# Altium PCB PCB1.PcbDoc
Units mm, origin at the board's own origin, x right, y up, seen from the top; angles counter-clockwise.
Board outline 122.68 x 41.02 mm, 2 copper layers (Top Layer, Bottom Layer); 45 components, 46 nets, 188 pads, 7 vias.
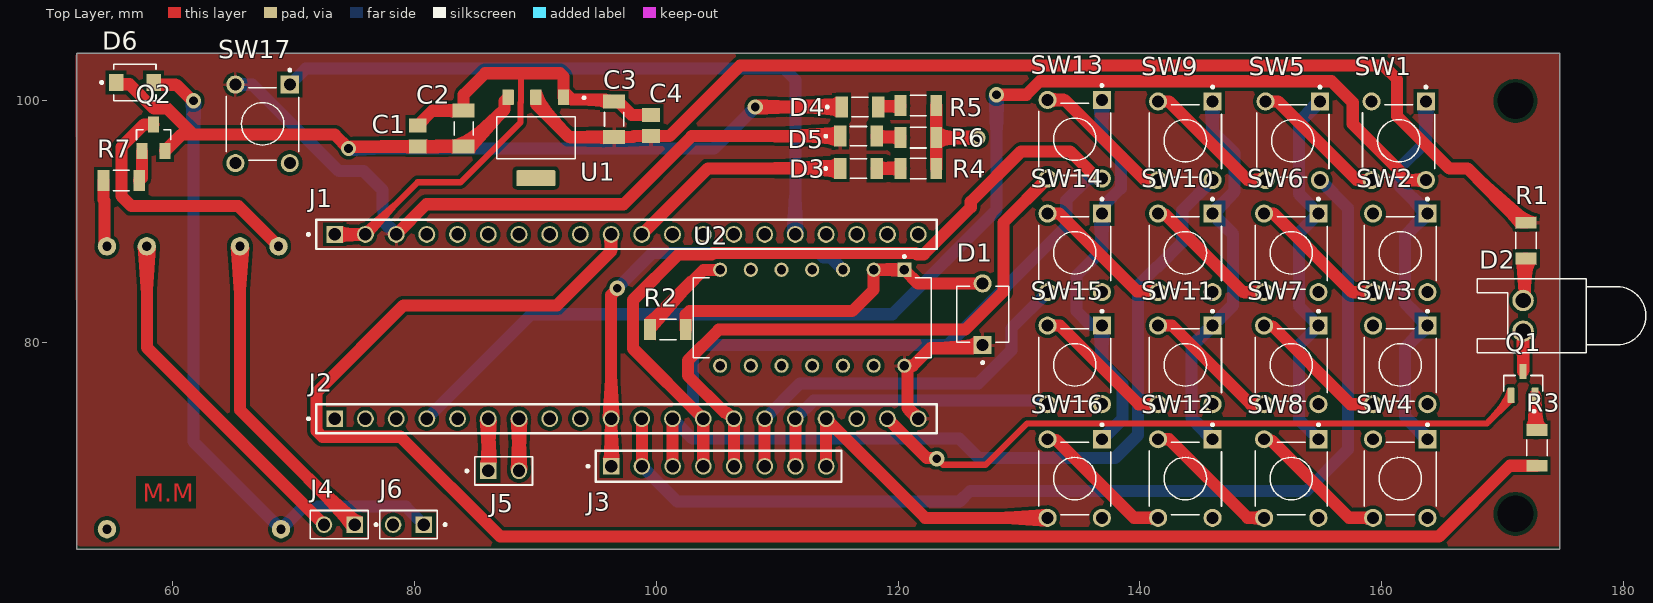
[diagram p0: Top Layer view]
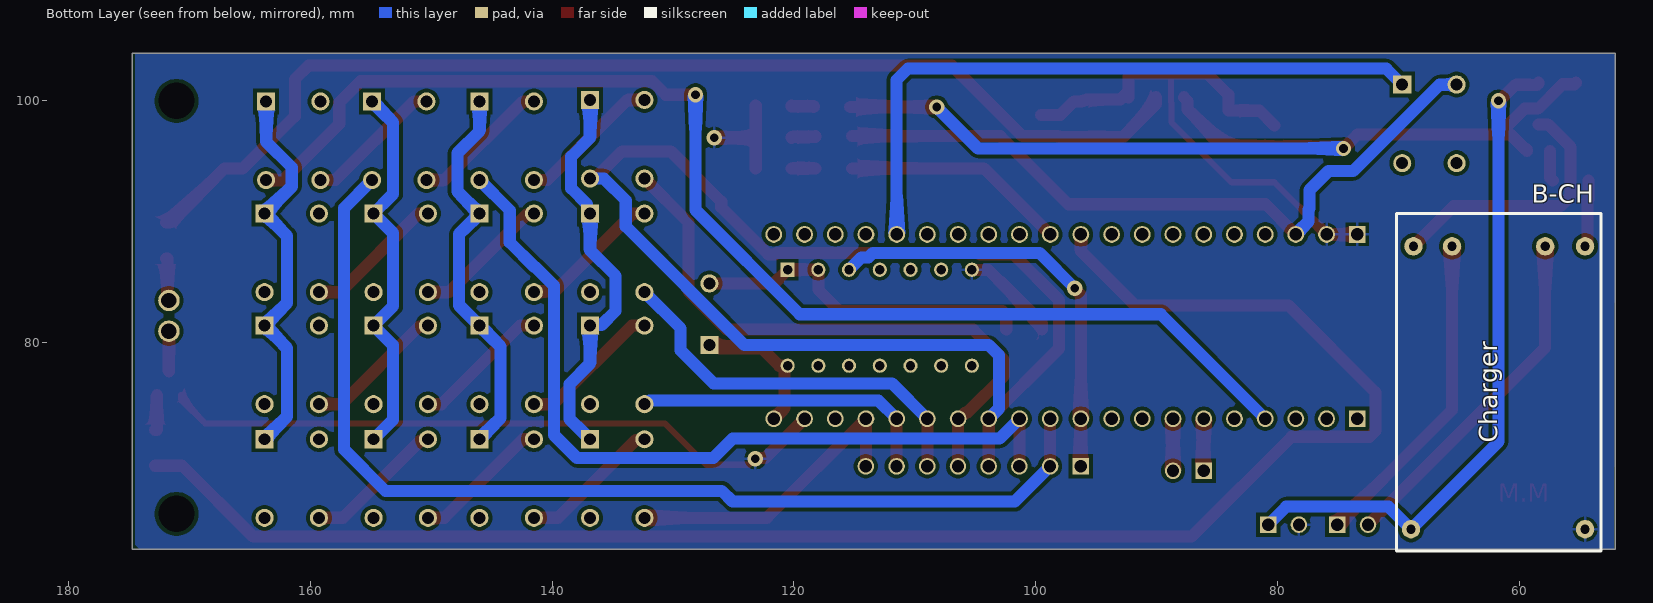
[diagram p1: Bottom Layer view, seen from below]
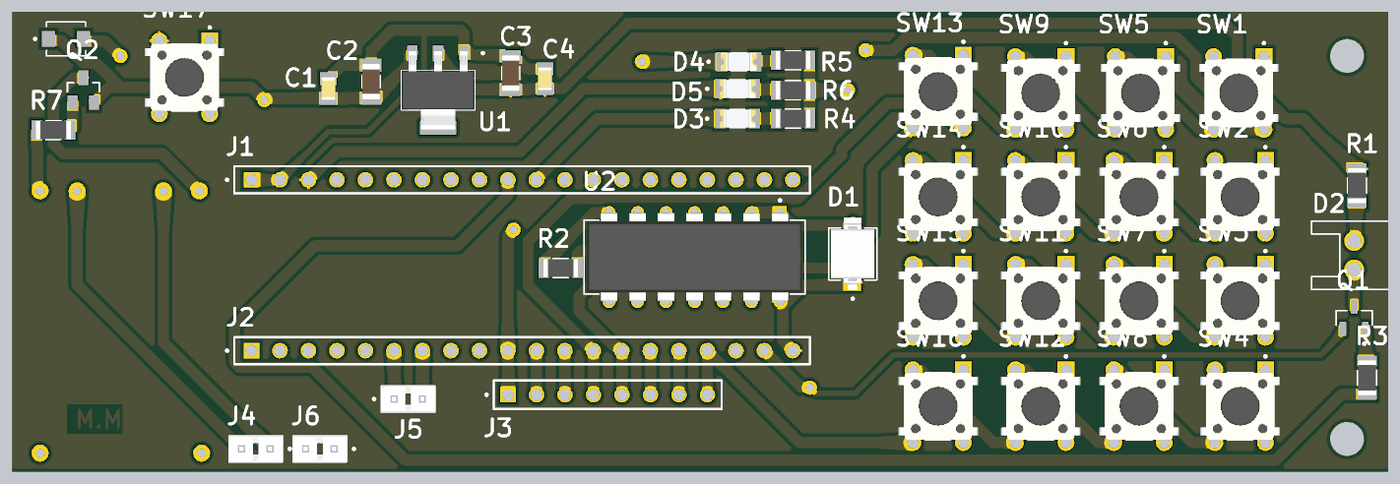
[diagram p2: 3D render of the assembled board from above, using the file's embedded part models]

## Layer stack, top to bottom
Top Solder: solder mask 0.0102, Solder Resist, Dk 3.5
Top Layer: signal copper 0.0356
Dielectric 1: dielectric 0.32, FR-4, Dk 4.8
Bottom Layer: signal copper 0.0356
Bottom Solder: solder mask 0.0102, Solder Resist, Dk 3.5

## Board outline
52.07,62.865 174.752,62.865 174.752,103.886 52.07,103.886

## Design rules (kind name [scope] priority, off if disabled: settings)
Clearance [All] p1: gap=0.3 ignorepadtopadclearanceinfootprint=FALSE except(0.1: Arc-SMDPad Track-SMDPad SMDPad-SMDPad)
PolygonConnect [All] p1: connectstyle=Relief reliefconductorwidth=0.254 reliefentries=4 polygonreliefangle="90 Angle" airgapwidth=0.254
RoutingVias [All] p1: holewidth=0.711 width=1.27 viastyle="Through Hole" minholewidth=0.711 minwidth=1.27 maxholewidth=0.711 maxwidth=1.27
SolderMaskExpansion [All] p1: expansion=0.102 istentingtop=FALSE
SupplyNets "Schematic Supply Nets_4" [InNet('GND')] p1: voltage=0.000
SupplyNets "Schematic Supply Nets_3" [InNet('3.3V')] p2: voltage=0.000
SupplyNets "Schematic Supply Nets_2" [InNet('PA5')] p3: voltage=0.000
SupplyNets "Schematic Supply Nets" [InNet('VIN')] p4: voltage=0.000
Width [All] p1: maxlimit=1 minlimit=0.3 preferedwidth=0.5
30 further rules are at their usual default settings.

## Components (designator, comment, footprint, x,y, rotation, side; value= is the part's Value field where it differs from the comment)
B-CH "battery chargger TC4056" "battery charger TC4056" 53.261,62.716 r90 bottom
C1 "C104" CAPC2012X88N 80.264,97.042 r90 top
C2 "C106" CAPC3216X120N 84.074,97.663 r90 top
C3 "C106" CAPC3216X120N 96.52,98.425 r90 top
C4 "C104" CAPC2012X88N 99.568,97.917 r90 top
D1 "BPW34" DIO_BPW34 127,82.296 r90 top
D2 "LED0" LED-0 171.704,82.169 r90 top
D3 "LED1206" LEDC3216X120N 116.727,94.361 r0 top
D4 "LED1206" LEDC3216X120N 116.854,99.441 r0 top
D5 "LED1206" LEDC3216X120N 116.727,97.028 r0 top
D6 "SS34" DIOM7959X265N 57.023,101.473 r0 top
J1 "Left" SAMTEC_SSW-120-01-G-S-LL 73.406,88.9 r0 top
J2 "SSW-120-01-G-S-LL" SAMTEC_SSW-120-01-G-S-LL 73.406,73.66 r0 top
J3 "MTSW-108-22-L-S-205" SAMTEC_MTSW-108-22-L-S-205 105.166,69.723 r180 top
J4 "3-644456-2" TE_3-644456-2 75.057,64.897 r180 top
J5 "3-644456-2" TE_3-644456-2 86.106,69.342 r0 top
J6 "3-644456-2" TE_3-644456-2 80.772,64.897 r180 top
Q1 "BC847B" SOT100P230X110-3N 171.704,76.581 r180 top
Q2 "IRLML6401" SOT23-3 58.42,96.901 r0 top
R1 "RC1206JR-0713RL" RESC3116X65N 171.958,88.392 r90 top
R2 "RC1206JR-0713RL" RESC3116X65N 100.965,81.026 r0 top
R3 "RC1206JR-0713RL" RESC3116X65N 172.847,71.247 r270 top
R4 "RC1206JR-0713RL" RESC3116X65N 121.68,94.361 r180 top
R5 "RC1206JR-0713RL" RESC3116X65N 121.68,99.568 r180 top
R6 "RC1206JR-0713RL" RESC3116X65N 121.68,96.901 r180 top
R7 "RC1206JR-0713RL" RESC3116X65N 55.753,93.345 r0 top
SW1 "1825910-6" SW_1825910-6-4 161.417,96.647 r270 top
SW2 "1825910-6" SW_1825910-6-4 161.544,87.376 r270 top
SW3 "1825910-6" SW_1825910-6-4 161.544,78.105 r270 top
SW4 "1825910-6" SW_1825910-6-4 161.544,68.707 r270 top
SW5 "1825910-6" SW_1825910-6-4 152.654,96.647 r270 top
SW6 "1825910-6" SW_1825910-6-4 152.527,87.376 r270 top
SW7 "1825910-6" SW_1825910-6-4 152.527,78.105 r270 top
SW8 "1825910-6" SW_1825910-6-4 152.527,68.707 r270 top
SW9 "1825910-6" SW_1825910-6-4 143.764,96.647 r270 top
SW10 "1825910-6" SW_1825910-6-4 143.764,87.376 r270 top
SW11 "1825910-6" SW_1825910-6-4 143.764,78.105 r270 top
SW12 "1825910-6" SW_1825910-6-4 143.764,68.707 r270 top
SW13 "1825910-6" SW_1825910-6-4 134.62,96.774 r270 top
SW14 "1825910-6" SW_1825910-6-4 134.62,87.376 r270 top
SW15 "1825910-6" SW_1825910-6-4 134.62,78.105 r270 top
SW16 "1825910-6" SW_1825910-6-4 134.62,68.707 r270 top
SW17 "1825910-6" SW_1825910-6-4 67.437,98.044 r270 top
U1 "AMS1117-3.3" SOT229P700X180-4N 90.043,96.901 r180 top
U2 "CD4093BE" DIP794W45P254L1969H508Q14 112.903,82.009 r270 top

## Footprints (in the part's own frame and the unit in brackets; to place one, negate y for a bottom-side part, rotate by r counter-clockwise, add the part's x,y. Pads: shape width x height; smd on the part's side, far side on the other; paste and mask are expansions set on the pad)
"battery charger TC4056" [mil]
  round 60 hole 30: 1(70.87,618.11) 2(70.87,51.18) 3(992.13,610.24) 4(992.13,51.18) 5(992.13,484.25) 6(992.13,181.1)
  silkscreen extent 0,0 1098,665
CAPC2012X88N [mm]
  rect 1.16x1.47 smd: 1(-0.875,0) 2(0.875,0)
  body extent -1.02,-0.64 1.02,0.64, height 1.4
CAPC3216X120N [mm]
  rect 1.16x1.82 smd: 1(-1.475,0) 2(1.475,0)
  silkscreen extent -0.57,-0.8 0.57,0.8, body extent -1.6,-0.8 1.6,0.8, height 1.8
DIO_BPW34 [mm]
  round 1.5 hole 1: A(2.55,0)
  rect 1.5x1.5 / inner round 1.5 / far side rect 1.5x1.5 hole 1: C(-2.55,0)
  silkscreen extent -4.1,-2.15 2.32,2.15, body extent -3.22,-1.92 3.22,1.92, height 1.3
DIOM7959X265N [mm]
  rect 1.2x1.4 smd: A(1.4,0) C(-1.7,0)
  silkscreen extent -3,-1.5 1.6,1.5
DIP794W45P254L1969H508Q14 [mm]
  rect 1.17x1.17 / inner round 1.17 / far side rect 1.17x1.17 hole 0.77: 1(-3.97,7.62)
  round 1.17 hole 0.77: 2(-3.97,5.08) 3(-3.97,2.54) 4(-3.97,0) 5(-3.97,-2.54) 6(-3.97,-5.08) 7(-3.97,-7.62) 8(3.97,-7.62) 9(3.97,-5.08) 10(3.97,-2.54) 11(3.97,0) 12(3.97,2.54) 13(3.97,5.08) 14(3.97,7.62)
  silkscreen extent -5.15,-9.84 3.3,9.84, body extent -3.94,-9.65 3.94,9.65, height 5.08
LED-0 [mil] "Typical INFRARED GaAs LED; 2 Leads"
  round 70 hole 50: 1(50,0) 2(-50,0)
  silkscreen extent -120,-400 120,150
LEDC3216X120N [mm]
  rect 1.01x1.73 smd: NEG(1.51,0) POS(-1.51,0)
  silkscreen extent -2.8,-0.8 0.68,0.8, body extent -1.6,-0.8 1.6,0.8, height 1.2
RESC3116X65N [mm]
  rect 0.97x1.73 smd: 1(-1.48,0) 2(1.48,0)
  silkscreen extent -0.67,-0.85 0.67,0.85, body extent -1.55,-0.8 1.55,0.8, height 0.65
SAMTEC_MTSW-108-22-L-S-205 [mm]
  rect 1.37x1.37 / inner round 1.37 / far side rect 1.37x1.37 hole 1.02: 01(8.89,0)
  round 1.37 hole 1.02: 02(6.35,0) 03(3.81,0) 04(1.27,0) 05(-1.27,0) 06(-3.81,0) 07(-6.35,0) 08(-8.89,0)
  silkscreen extent -10.16,-1.27 10.91,1.27
SAMTEC_SSW-120-01-G-S-LL [mm]
  rect 1.39x1.39 hole 1.04: 01(0,0)
  round 1.39 hole 1.04: 02(2.54,0) 03(5.08,0) 04(7.62,0) 05(10.16,0) 06(12.7,0) 07(15.24,0) 08(17.78,0) 09(20.32,0) 10(22.86,0) 11(25.4,0) 12(27.94,0) 13(30.48,0) 14(33.02,0) 15(35.56,0) 16(38.1,0) 17(40.64,0) 18(43.18,0) 19(45.72,0) 20(48.26,0)
  silkscreen extent -2.27,-1.21 49.79,1.21
SOT23-3 [mm]
  rect 0.9x1.3 smd: 1(-0.95,-1.1) 2(0.95,-1.1) 3(0,1.1)
  silkscreen extent -1.42,-0.15 1.42,0.66
SOT100P230X110-3N [mm]
  rrect25% 0.59x1.26 smd: 1(-1,0.98) 2(1,0.98) 3(0,-0.98)
  silkscreen extent -1.61,-0.65 1.61,2.4
SOT229P700X180-4N [mm]
  rrect15% 0.93x1.31 smd: 1(-2.29,-3.345) 2(0,-3.345) 3(2.29,-3.345)
  rrect15% 3.24x1.31 smd: 4(0,3.345)
  silkscreen extent -4.09,-3.4 3.25,1.75, body extent -3.25,-3.5 3.25,3.5, height 1.8
SW_1825910-6-4 [mm]
  rect 1.498x1.498 / inner round 1.498 / far side rect 1.498x1.498 hole 0.99: 1(-3.25,2.25)
  round 1.498 hole 0.99: 2(3.25,2.25) 3(-3.25,-2.25) 4(3.25,-2.25)
  silkscreen extent -4.54,-3 3,3, body extent -3,-3.9 3,3.9, height 5.01
TE_3-644456-2 [mm]
  rect 1.37x1.37 / inner round 1.37 / far side rect 1.37x1.37 hole 1.02: 1(0,0)
  round 1.37 hole 1.02: 2(2.54,0)
  silkscreen extent -1.87,-1.17 3.66,1.17, body extent -1.12,-1.17 3.66,1.17, height 10.03

## Part data
C1 C4: library part C0805C475K3PACTU, "Capacitor;Ceramic;Cap 4.7uF;Tol+10%;SMT;Vol-Rtg 25V;X5R;TR", Package="0805 Kemet", Check_prices=https://www.snapeda.com/parts/C0805C475K3PACTU/KEMET/view-part/?ref=eda, MF=KEMET, MP=C0805C475K3PACTU, SnapEDA_Link=https://www.snapeda.com/parts/C0805C475K3PACTU/KEMET/view-part/?ref=snap
C2 C3: library part C1206C105K5RACTU, "1206 C 1uF Ceramic Multilayer Capacitor, 50 VDC, +125degC, X7R Dielec, +/-10%", Package="1206-2 KEMET", Check_prices=https://www.snapeda.com/parts/C1206C105K5RACTU/KEMET/view-part/?ref=eda, MF=KEMET, MP=C1206C105K5RACTU, SnapEDA_Link=https://www.snapeda.com/parts/C1206C105K5RACTU/KEMET/view-part/?ref=snap
D1: "Photodiode 850nm 20ns 120Â° 2-DIP (0.213, 5.40mm)", Package="SMD-2 OSRAM Opto Semiconductors", Check_prices=https://www.snapeda.com/parts/BPW%2034/OSRAM/view-part/?ref=eda, MF="OSRAM Opto Semiconductors", MP="BPW 34", SnapEDA_Link=https://www.snapeda.com/parts/BPW%2034/OSRAM/view-part/?ref=snap
D2: "Typical INFRARED GaAs LED", LatestRevisionDate=08-Jul-2005, LatestRevisionNote="Mech Layer 1 removed.", PackageReference=LED-0, Published=8-Jun-2000, Publisher="Altium Limited"
D3 D4 D5: library part LHN974_RED_LED_1206, "2.6 V Red LED SMD", Package=None, Check_prices=https://www.snapeda.com/parts/LHN974%20RED%20LED%201206/Osram/view-part/?ref=eda, MF=Osram, MP="LHN974 RED LED 1206", SnapEDA_Link=https://www.snapeda.com/parts/LHN974%20RED%20LED%201206/Osram/view-part/?ref=snap
D6: "Diode Schottky 40 V 3A Surface Mount SMC (DO-214AB)", Package="SMC-2 ON Semiconductor", Check_prices=https://www.snapeda.com/parts/SS34/Onsemi/view-part/?ref=eda, MF=onsemi, MP=SS34, SnapEDA_Link=https://www.snapeda.com/parts/SS34/Onsemi/view-part/?ref=snap
J1: library part SSW-120-01-G-S-LL, Package=None, Availability=Unavailable, MF=Samtec, MP=SSW-120-01-G-S-LL, Price=None
J2 J3: Package=None, Availability=Unavailable, Price=None
  J2: MF=Samtec, MP=SSW-120-01-G-S-LL
  J3: MP=MTSW-108-22-L-S-205
J4 J5 J6: "HEADER ASSEMBLY, NARROW, MTA-100, 2 POSITION, STRAIGHT", Package=None, Check_prices=https://www.snapeda.com/parts/3-644456-2/TE+Connectivity+AMP+Connectors/view-part/?ref=eda, MF="TE Connectivity", MP=3-644456-2, SnapEDA_Link=https://www.snapeda.com/parts/3-644456-2/TE+Connectivity+AMP+Connectors/view-part/?ref=snap
Q1: "Bipolar (BJT) Transistor NPN 45V 100mA 100MHz 150mW Surface Mount SOT-523", Package=None, Availability=Unavailable, MP=BC847B, Price=None
Q2: "P-Channel 12V 4.3A (Ta) 1.3W (Ta) Surface Mount Micro3â„¢/SOT-23", Package="SOT-23 International Rectifier", Availability=Unavailable, Check_prices=https://www.snapeda.com/parts/IRLML6401/International%20Rectifier/view-part/557178/?ref=eda, MF="International Rectifier", MP=IRLML6401, Price=None, SnapEDA_Link=https://www.snapeda.com/parts/IRLML6401/International%20Rectifier/view-part/557178/?ref=snap
R1 R2 R3 R4 R5 R6 R7: "13 Ohms Â±5% 0.25W, 1/4W Chip Resistor 1206 (3216 Metric) Moisture Resistant Thick Film", Package="3116 Yageo", Availability="In Stock", Check_prices=https://www.snapeda.com/parts/RC1206JR-0713RL/Yageo/view-part/?ref=eda, MF=Yageo, MP=RC1206JR-0713RL, Price=None, Purchase-URL=https://pricing.snapeda.com/search/part/RC1206JR-0713RL/?ref=eda, SnapEDA_Link=https://www.snapeda.com/parts/RC1206JR-0713RL/Yageo/view-part/?ref=snap
SW1 SW2 SW3 SW4 SW5 SW6 SW7 SW8 SW9 SW10 SW11 SW12 SW13 SW14 SW15 SW16 SW17: "Switch Push Button OFF (ON) SPST Round Button 0.05A 24VDC Momentary Contact PC Pins Thru-Hole", Package=None, Check_prices=https://www.snapeda.com/parts/1825910-6/TE+Connectivity+ALCOSWITCH+Switches/view-part/?ref=eda, Digi-Key_Part_Number=450-1650-ND, MF="TE Connectivity", MP=1825910-6, Purchase-URL=https://pricing.snapeda.com/search/part/1825910-6/?ref=eda, SnapEDA_Link=https://www.snapeda.com/parts/1825910-6/TE+Connectivity+ALCOSWITCH+Switches/view-part/?ref=snap
U1: "Sot223/Pkg 1-Amp 3.3-Volt Low Drop Out Voltage Regulatator", Package="SOT-223 Seeed Technology", Check_prices=https://www.snapeda.com/parts/AMS1117-3.3/Advanced+Monolithic+Systems/view-part/?ref=eda, MF="Advanced Monolithic Systems", MP=AMS1117-3.3, SnapEDA_Link=https://www.snapeda.com/parts/AMS1117-3.3/Advanced+Monolithic+Systems/view-part/?ref=snap
U2: "4-ch, 2-input, 3-V to 18-V NAND gates with Schmitt-Trigger inputs", Package="PDIP-14 Texas Instruments", Check_prices=https://www.snapeda.com/parts/CD4093BE/Texas+Instruments/view-part/?ref=eda, MF="Texas Instruments", MP=CD4093BE, SnapEDA_Link=https://www.snapeda.com/parts/CD4093BE/Texas+Instruments/view-part/?ref=snap

## Free pads (board coordinates)
  round 1.524 hole 3: 2(171.069,99.949) 3(171.069,65.786)

## Via types
v1: diameter 1.27, hole 0.711, Top Layer to Bottom Layer, 7 vias

## Nets (pads, with @x,y where several pads share a name; then routed paths per layer and width w, separated by ;. In a path a pad name is that pad's centre, name@x,y a point inside that pad or via, vN(x,y) a via of type N, cw(c..) or ccw(c..) an arc to the next point about the centre after c; other vN are vias at no path point)
3.3V: C3.1 C4.1 D1.C D5.POS J1.03 J2.20 R1.2 SW17.3 U1.2 U2.14 | length 164.8
  Top Layer w1: J1.03 80.984,91.398 97.305,91.398 102.935,97.028 D5.POS ; U1.2 90.043,99.695 92.788,96.95 C3.1 98.086,96.95 98.178,97.042 C4.1 101.111,97.042 106.939,102.87 131.187,102.87 131.19,102.873 133.55,102.873 133.553,102.87 135.248,102.87 135.251,102.873 138.489,102.873 138.492,102.87 160.147,102.87 161.29,101.727 161.29,98.679 165.608,94.361 167.119,94.361 171.608,89.872 R1.2 ; U2.14 121.219,78.039 122.676,79.496 126.75,79.496 D1.C ; U2.14@120.777,77.691 120.777,74.549 J2.20
  Bottom Layer w1: SW17.3 66.6,101.294 73.746,94.148 75.778,94.148 77.351,92.575 77.351,91.051 77.428,90.974 77.428,89.958 J1.03
bat+: B-CH.5 J4.1 | length 27
  Top Layer w1: B-CH.5 65.561,74.393 J4.1
bat-: B-CH.6 J4.2 | length 29.1
  Top Layer w1: B-CH.6 57.861,79.553 J4.2
GND: B-CH.2 C1.2 C2.2 C3.2 C4.2 J1.01 J1.02 J2.19 J6.2 Q1.2 R2.1 R4.1 R5.1 R6.1 U1.1 U2.7 | length 120.3
  Top Layer w0.5: J1.02 80.264,93.218 83.82,93.218 88.783,98.181 88.783,99.791 88.803,99.811 88.803,102.011 89.027,102.235 ; v1(123.19,70.358) 123.213,70.358 123.721,69.85 127.254,69.85 130.683,73.279 168.717,73.279 170.704,75.266 Q1.2
  Top Layer w1: J1.01 J1.02 ; C1.2 81.485,99.138 C2.2 84.074,100.457 85.852,102.235 89.027,102.235 92.04,102.235 92.333,101.942 U1.1 ; U1.1@92.333,100.5 92.587,100.5 93.011,100.076 95.817,100.076 95.913,99.98 96.11,99.98 96.19,99.9 96.85,99.9 97.958,98.792 C4.2 ; R2.1 99.485,81.534 103.9,85.949 105.253,85.949 U2.7 ; J2.19 122.376,70.41 123.138,70.41 v1(123.19,70.358) ; R4.1 R6.1 ; R5.1 R6.1 ; v1(126.581,96.901) R6.1
IN+: B-CH.1 D6.A J6.1 | length 55.6
  Top Layer w1: D6.A 58.423,101.373 58.523,101.273 60.325,101.273 61.649,99.949 v1(61.722,99.949)
  Bottom Layer w1: v1(61.722,99.949) 61.722,71.755 B-CH.1 70.827,66.382 79.287,66.382 J6.1
NetB-CH_3: B-CH.3 Q2.3 | length 22.2
  Top Layer w1: Q2.3 57.615,98.001 55.753,96.139 55.753,92.074 56.582,91.245 65.432,91.245 B-CH.3
NetB-CH_4: B-CH.4 R7.1 | length 5.5
  Top Layer w1: R7.1 54.273,91.769 54.356,91.686 54.356,88.263 54.561,88.058 B-CH.4
NetD1_A: D1.A R2.2 U2.1 U2.2 | length 28.7
  Top Layer w1: R2.2 102.445,82.257 102.738,82.55 116.205,82.55 117.983,84.328 U2.2 U2.1 ; U2.1@120.553,85.949 121.656,84.846 D1.A
NetD2_1: D2.1 R1.1 | length 3.6
  Top Layer w1: D2.1 171.831,83.566 171.831,86.897 171.846,86.912 R1.1
NetD2_2: D2.2 Q1.3 | length 3.3
  Top Layer w1: Q1.3 D2.2
NetD3_NEG: D3.NEG R4.2 | length 2
  Top Layer w1: D3.NEG R4.2
NetD4_NEG: D4.NEG R5.2 | length 2
  Top Layer w1: D4.NEG 118.364,99.5 118.369,99.504 120.185,99.504 120.2,99.52 R5.2
NetD5_NEG: D5.NEG R6.2 | length 2.1
  Top Layer w1: D5.NEG 118.237,96.969 118.242,96.965 120.185,96.965 120.2,96.949 R6.2
NetQ1_1: Q1.1 R3.1 | length 3
  Top Layer w1: Q1.1 172.704,72.742 172.719,72.727 R3.1
NetQ2_1: Q2.1 R7.2 | length 2.6
  Top Layer w1: R7.2 57.47,93.582 Q2.1
NetSW1_1: SW1.1 SW2.1 SW3.1 SW4.1 | length 32.8
  Bottom Layer w1: SW1.1 163.667,96.577 161.544,94.454 161.544,92.876 SW2.1 161.925,88.757 161.925,83.224 SW3.1 161.925,79.486 161.925,73.826 SW4.1
NetSW1_4: SW1.4 SW5.3 | length 11.5
  Top Layer w1: SW5.3 151.436,99.897 157.936,93.397 SW1.4
NetSW2_4: SW2.4 SW6.3 | length 11.7
  Top Layer w1: SW6.3 151.055,90.626 157.555,84.126 SW2.4
NetSW3_4: SW3.4 SW7.3 | length 11.7
  Top Layer w1: SW7.3 150.335,81.297 150.986,81.297 157.428,74.855 SW3.4
NetSW4_4: SW4.4 SW8.3 | length 11.7
  Top Layer w1: SW8.3 150.372,71.862 150.896,71.862 157.301,65.457 SW4.4
NetSW5_1: SW5.1 SW6.1 SW7.1 SW8.1 | length 32.3
  Bottom Layer w1: SW8.1 153.162,73.572 153.162,79.74 SW7.1 153.162,82.97 153.162,89.011 SW6.1 ; SW5.1 153.162,98.155 153.162,92.241 SW6.1@154.957,90.446
NetSW5_4: SW5.4 SW9.3 | length 11.6
  Top Layer w1: SW9.3 142.419,99.897 148.919,93.397 SW5.4
NetSW6_4: SW6.4 SW10.3 | length 11.5
  Top Layer w1: SW10.3 141.609,90.531 142.133,90.531 148.538,84.126 SW6.4
NetSW7_4: SW7.4 SW11.3 | length 11.5
  Top Layer w1: SW11.3 142.673,81.355 149.173,74.855 SW7.4
NetSW8_4: SW8.4 SW12.3 | length 11.5
  Top Layer w1: SW12.3 142.419,71.957 148.919,65.457 SW8.4
NetSW9_1: SW9.1 SW10.1 SW11.1 SW12.1 | length 32.3
  Bottom Layer w1: SW12.1 144.272,73.699 144.272,79.613 SW11.1 147.701,83.042 147.701,88.939 SW10.1 147.828,92.44 147.828,95.631 146.014,97.445 SW9.1
NetSW9_4: SW9.4 SW13.3 | length 11.9
  Top Layer w1: SW13.3 133.783,100.024 140.41,93.397 SW9.4
NetSW10_4: SW10.4 SW14.3 | length 11.8
  Top Layer w1: SW14.3 133.334,90.626 139.765,84.195 141.445,84.195 SW10.4
NetSW11_4: SW11.4 SW15.3 | length 11.8
  Top Layer w1: SW15.3 133.402,81.355 139.902,74.855 SW11.4
NetSW12_4: SW12.4 SW16.3 | length 11.8
  Top Layer w1: SW16.3 132.428,71.899 133.079,71.899 139.521,65.457 SW12.4
NetSW13_1: SW13.1 SW14.1 SW15.1 SW16.1 | length 33
  Bottom Layer w1: SW16.1 138.557,73.644 138.557,76.535 136.87,78.222 SW15.1 136.814,81.411 135.914,81.411 134.747,82.577 134.747,85.471 136.87,87.594 SW14.1 137.119,90.875 137.119,91.399 138.43,92.71 138.43,95.331 136.87,96.891 SW13.1
PA0: J1.16 SW17.1 | length 55.5
  Bottom Layer w1: SW17.1 71.009,102.616 110.578,102.616 111.506,101.688 J1.16
PA5: D3.POS J1.11 | length 18.7
  Top Layer w1: J1.11 104.267,94.361 D3.POS
PA6: J1.10 R3.2 | length 140.8
  Top Layer w1: J1.10 96.266,87.503 91.779,83.016 79.079,83.016 71.911,75.848 71.911,72.634 72.38,72.165 78.838,72.165 87.095,63.908 164.746,63.908 170.605,69.767 R3.2
PA9/RX: J2.06 J5.1 | length 4.3
  Top Layer w1: J5.1 J2.06
PA10/TX: J2.07 J5.2 | length 4.3
  Top Layer w1: J5.2 J2.07
PA15: J2.10 J3.01 U2.3 | length 35.4
  Top Layer w1: J3.01 96.271,69.728 96.271,73.655 J2.10 96.266,83.874 96.774,84.382 v1(96.774,84.455)
  Bottom Layer w1: v1(96.774,84.455) 99.683,87.364 113.477,87.364 113.846,86.995 114.427,86.995 U2.3
PB3: J2.11 J3.02 SW5.2 | length 88.6
  Top Layer w1: J2.11 98.811,73.655 98.811,69.728 J3.02
  Bottom Layer w1: J3.02 101.737,66.802 125.092,66.802 125.981,67.691 153.797,67.691 157.226,71.12 157.226,91.075 SW5.2
PB4: J2.12 J3.03 SW9.2 | length 68.3
  Top Layer w1: J2.12 101.351,73.655 101.351,69.728 J3.03
  Bottom Layer w1: J2.12 102.986,72.02 125.067,72.02 126.678,70.408 137.95,70.408 139.857,72.315 139.857,84.66 141.404,86.207 141.47,86.207 143.51,88.248 143.51,90.893 SW9.2
PB5: J2.13 J3.04 SW13.2 | length 108.1
  Top Layer w1: J3.04 103.891,69.728 103.891,73.655 98.074,79.472 98.074,83.469 101.854,87.249 104.594,87.249 104.709,87.364 121.439,87.364 121.554,87.249 122.129,87.249 126.019,91.139 126.019,91.602 130.175,95.758 134.239,95.758 136.378,93.619 136.775,93.619 SW13.2
  Bottom Layer w1: J2.13 103.886,73.671 103.047,74.511 103.047,78.904 103.898,79.756 124.102,79.756 133.919,89.573 133.919,91.716 135.727,93.524 SW13.2
PB6: J2.14 J3.05 SW13.4 | length 49.8
  Top Layer w1: J3.05 106.431,69.728 106.431,73.655 J2.14 106.32,73.66 105.812,74.168 105.664,74.168 102.616,77.216 102.616,78.474 105.168,81.026 125.561,81.026 128.742,84.207 128.742,89.896 SW13.4
PB7: J2.15 J3.06 SW14.4 | length 32.7
  Top Layer w1: J3.06@108.971,69.728 J2.15@108.971,73.655
  Bottom Layer w1: J2.15 111.887,76.581 126.655,76.581 129.373,79.299 129.373,81.129 SW14.4 ; J3.06@108.971,69.728 J3.06
PB8: J2.16 J3.07 SW15.4 | length 25.5
  Top Layer w1: J2.16 111.511,73.655 111.511,69.728 J3.07
  Bottom Layer w1: J2.16 113.001,75.155 131.935,75.155 132.235,74.855 SW15.4
PB9: J2.17 J3.08 SW16.4 | length 25.7
  Top Layer w1: J2.17 J2.17@114.051,73.655 ; J3.08 114.051,69.728 J2.17@114.051,73.655 ; SW16.4 122.249,65.457 J2.17@114.051,73.655
PB15: J2.04 SW1.2 | length 104.2
  Top Layer w1: v1(128.143,100.457) 130.612,100.457 131.728,101.573 133.012,101.573 133.015,101.57 135.787,101.57 135.79,101.573 137.95,101.573 137.953,101.57 155.86,101.57 157.618,99.812 157.618,98.033 162.254,93.397 SW1.2
  Bottom Layer w1: J2.04 89.662,82.296 119.522,82.296 128.143,90.917 v1(128.143,100.457)
VIN: C1.1 C2.1 D4.POS D6.C Q2.2 U1.3 | length 82
  Top Layer w1: D6.C 55.323,101.424 55.423,101.324 56.423,101.324 58.446,99.301 59.576,99.301 61.722,97.155 ; Q2.2 59.37,95.901 59.42,95.951 59.52,95.951 60.724,97.155 61.722,97.155 ; v1(74.549,96.012) 73.406,97.155 61.722,97.155 ; v1@74.622,96.012 74.777,96.167 C1.1 80.264,96.177 84.063,96.177 C2.1 84.404,96.188 87.46,99.244 87.46,99.953 U1.3 ; v1(108.204,99.441) D4.POS
  Bottom Layer w1: v1(74.549,96.012) 104.775,96.012 v1(108.204,99.441)
pads on no net: J1.04 J1.05 J1.06 J1.07 J1.08 J1.09 J1.12 J1.13 J1.14 J1.15 J1.17 J1.18 J1.19 J1.20 J2.01 J2.02 J2.03 J2.05 J2.08 J2.09 J2.18 SW1.3 SW2.2 SW2.3 SW3.2 SW3.3 SW4.2 SW4.3 SW6.2 SW7.2 SW8.2 SW10.2 SW11.2 SW12.2 SW14.2 SW15.2 SW16.2 SW17.2 SW17.4 U1.4 U2.4 U2.5 U2.6 U2.8 U2.9 U2.10 U2.11 U2.12 U2.13

## Polygon pours and split planes (outlines as drawn)
3.3V on Top Layer "3.3V_L01_P001" (solid, remove dead copper, pour order 1): 51.943,103.886 174.498,103.886 174.625,104.013 174.752,103.886 174.752,63.119 52.324,63.119 52.07,62.865
GND on Bottom Layer "GND_L02_P000" (solid, remove dead copper, pour order 0): 52.07,103.886 174.498,103.886 174.498,63.246 174.117,62.865 52.197,62.865

## Other copper
Top Layer:
  text "M.M" at 57.531,66.802 h1.52

## Text inside footprints (layer, text, board x,y; h text height)
B-CH: Bottom Overlay "Charger" at 61.823,71.67 h1.52 r270